# Altium PCB Eink1.1.PcbDoc
Units mil, origin at the board's own origin, x right, y up, seen from the top; angles counter-clockwise.
Board outline 1259.84 x 1360 mil, 2 copper layers (Top Layer, Bottom Layer); 75 components, 47 nets, 231 pads, 73 vias.
Unrouted connection lines stored in the file: 52.
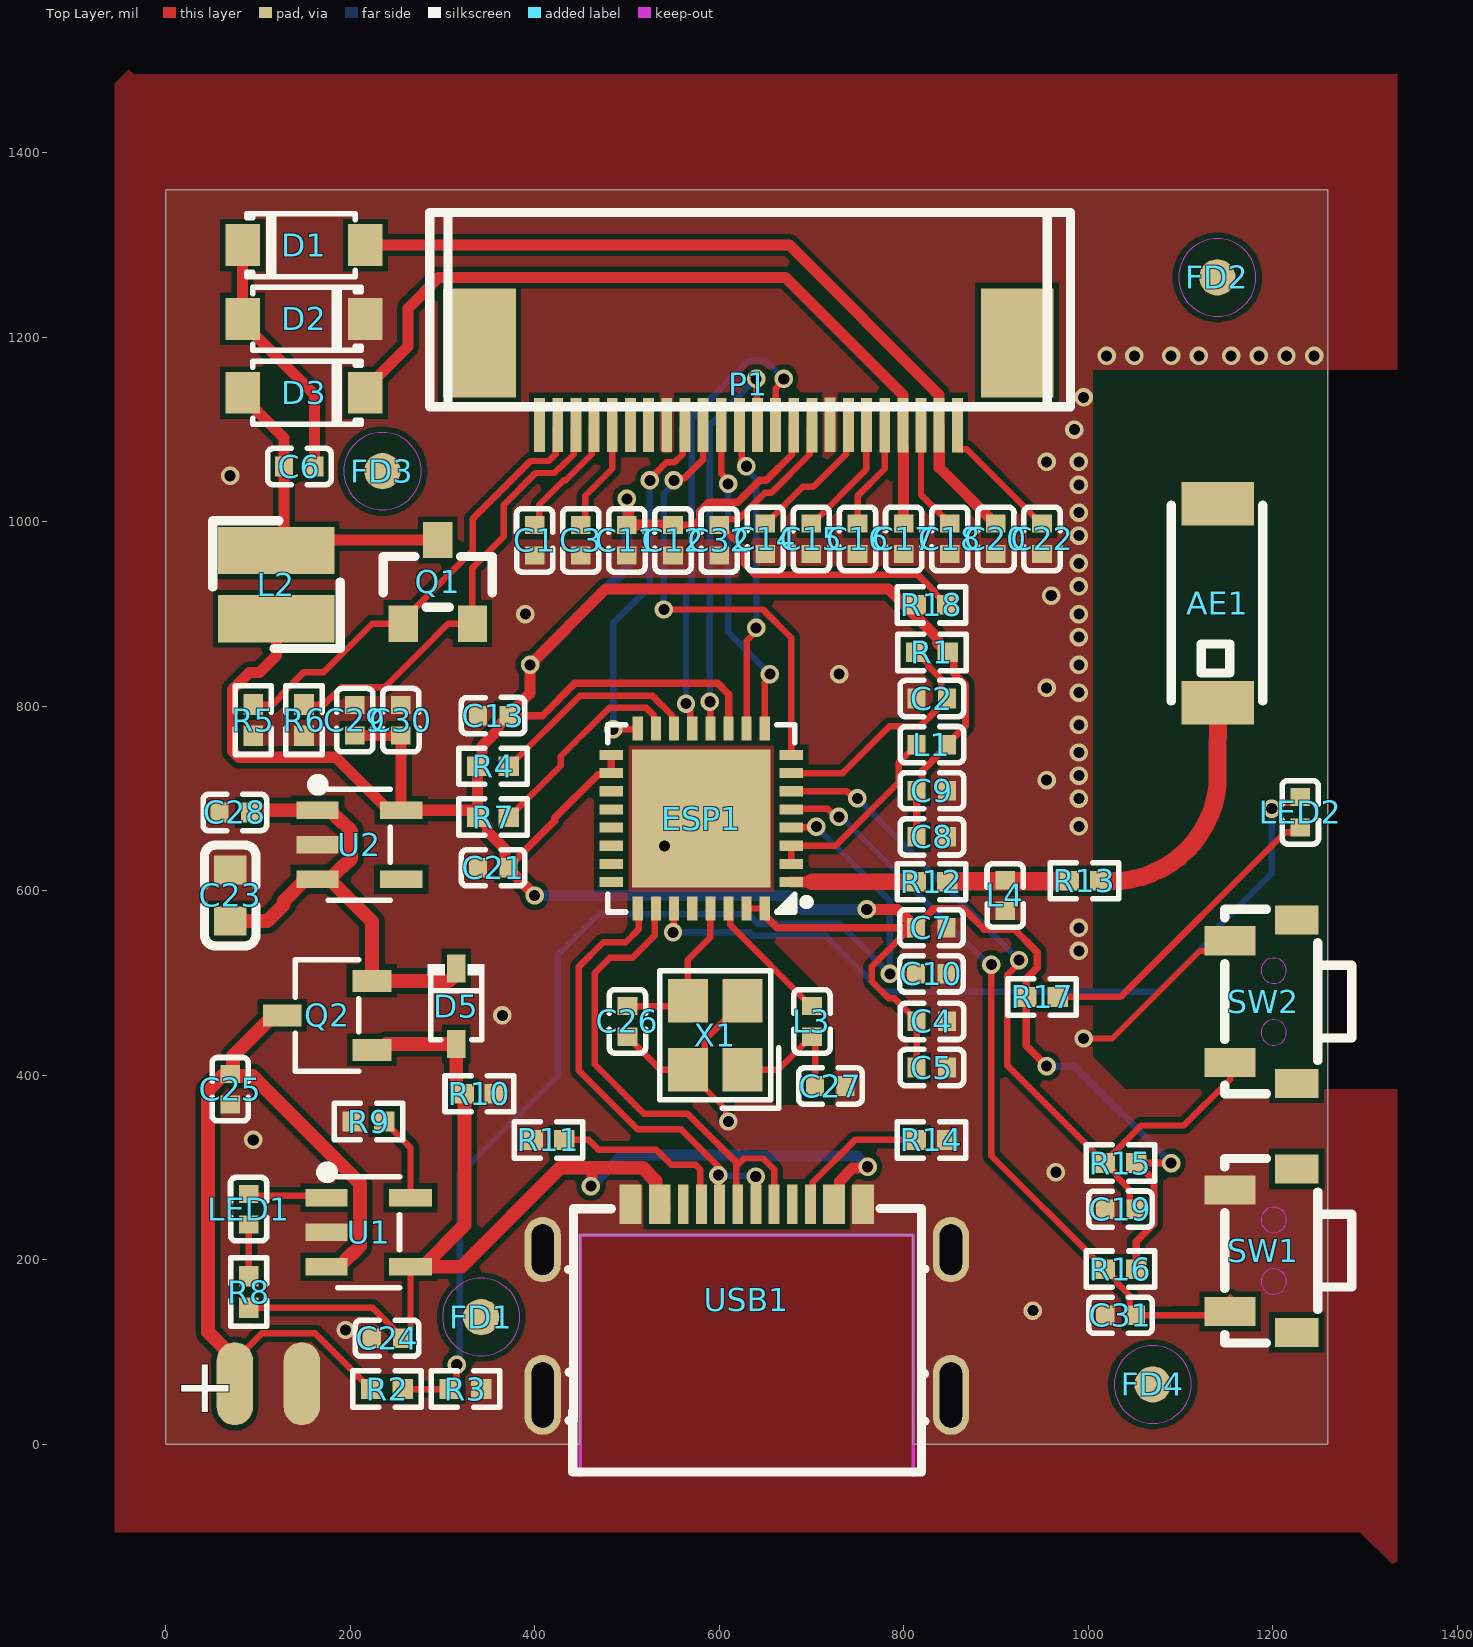
[diagram p0: Top Layer view]
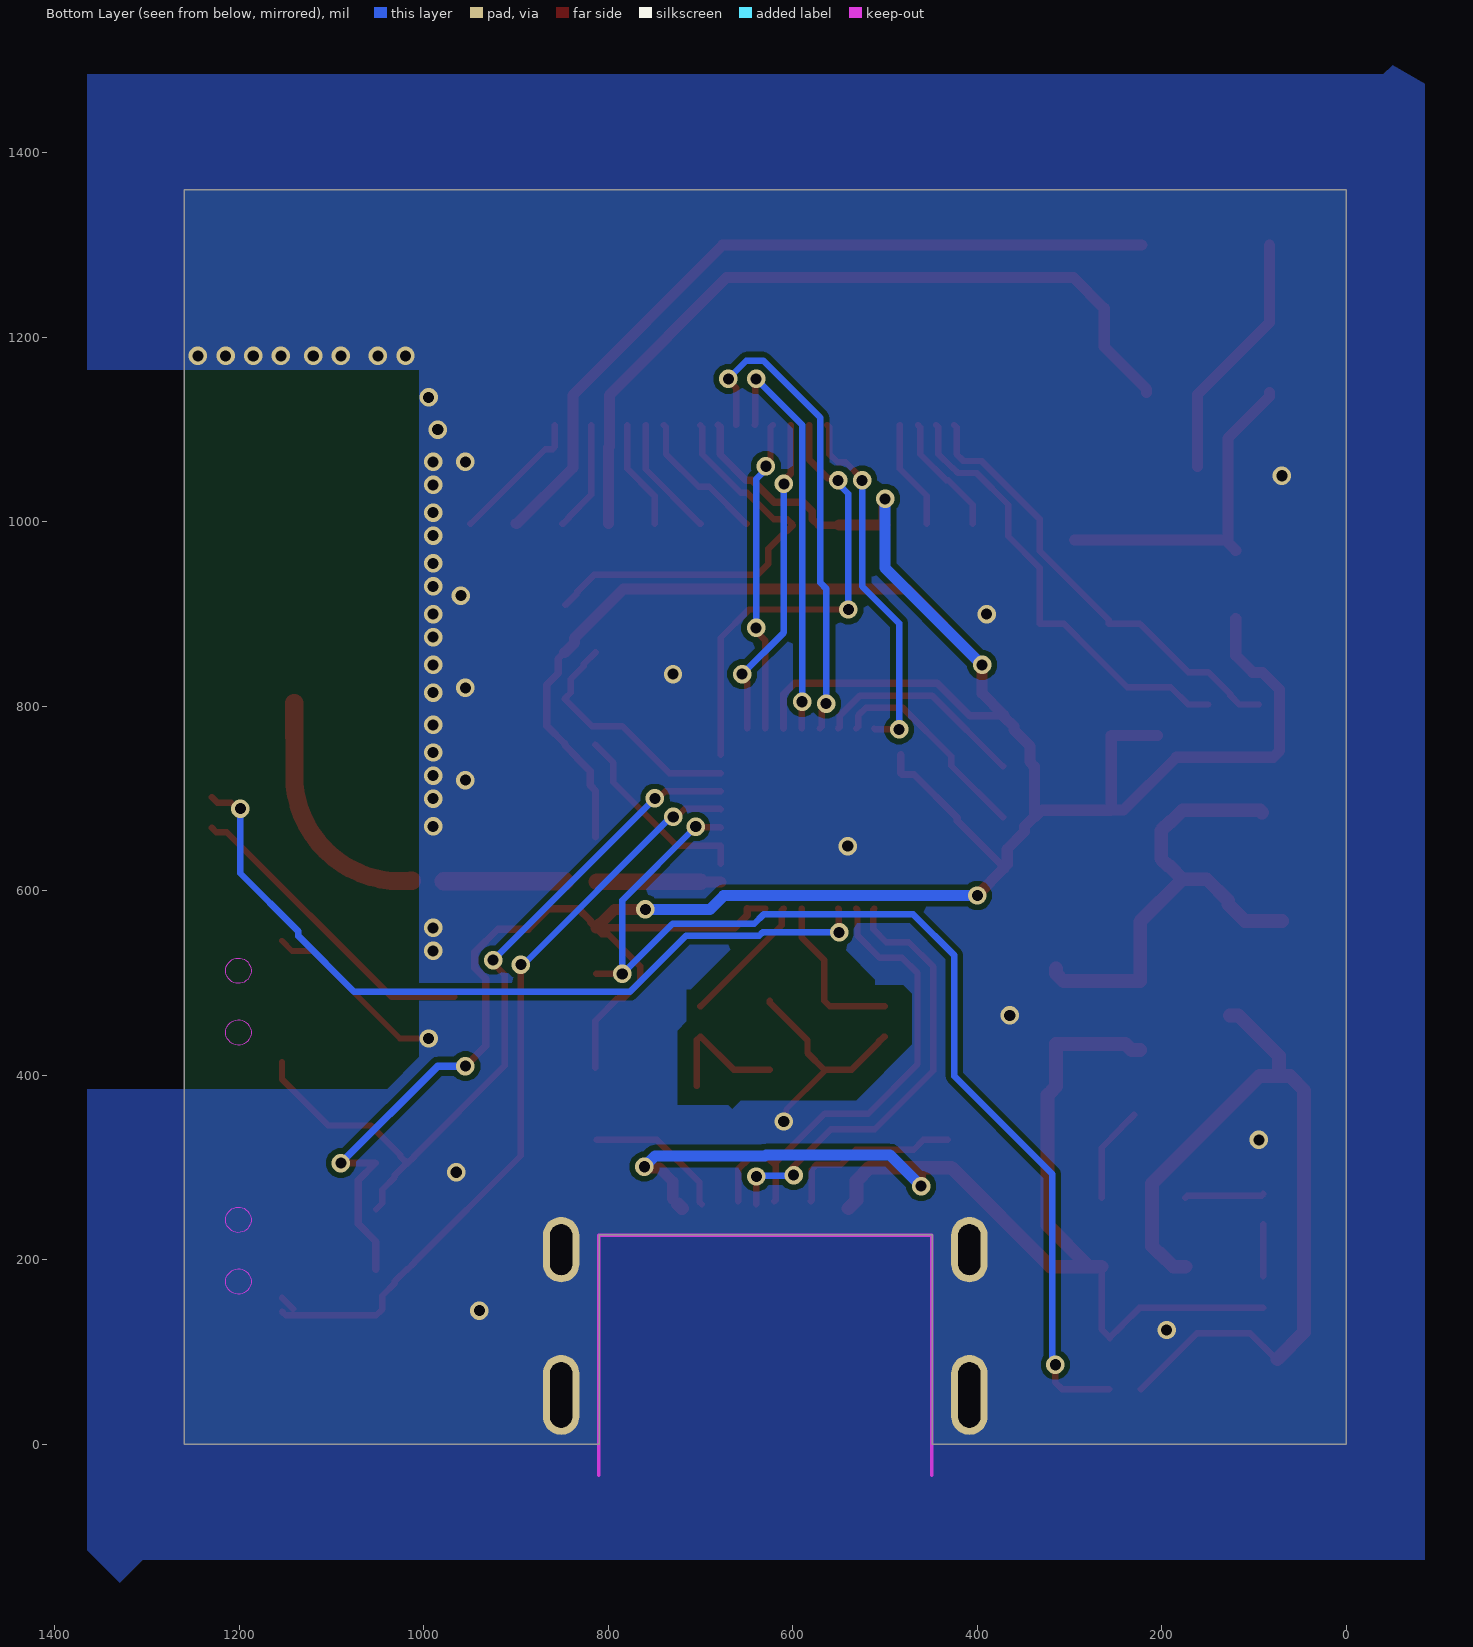
[diagram p1: Bottom Layer view, seen from below]

## Layer stack, top to bottom
Top Solder: solder mask 0.4, Solder Resist, Dk 3.5
Top Layer: signal copper 1.4
Dielectric 1: dielectric 12.6, FR-4, Dk 4.8
Bottom Layer: signal copper 1.4
Bottom Solder: solder mask 0.4, Solder Resist, Dk 3.5

## Board outline
0,0 0,1360 1259.84,1360 1259.84,0 810,0 810,227 449,227 449,0

## Design rules (kind name [scope] priority, off if disabled: settings)
Clearance [All] p1: gap=6 ignorepadtopadclearanceinfootprint=FALSE
ComponentClearance [All] p1: gap=2 collisioncheckmode=3 verticalgap=10 showdistances=FALSE
DiffPairsRouting [All] p1: maxlimit=10 minlimit=10 mostfreqgap=10 toplayer_minwidth=6 toplayer_maxwidth=15 toplayer_prefwidth=15 bottomlayer_minwidth=6 bottomlayer_maxwidth=15 bottomlayer_prefwidth=15 maxuncoupledlength=500
MatchedLengths [InDifferentialPairClass('All Differential Pairs')] p1: tolerance=39.37 checknetsindiffpair=FALSE checkdiffpairvsdiffpair=TRUE checkxsignals=TRUE checkothers=TRUE
MinimumSolderMaskSliver [All] p1: minsoldermaskwidth=2
PolygonConnect [All] p1: connectstyle=Direct reliefconductorwidth=10 reliefentries=4 polygonreliefangle="90 Angle" airgapwidth=10
RoutingVias [All] p1: holewidth=12 width=20 viastyle="Through Hole" minholewidth=12 minwidth=18 maxholewidth=30 maxwidth=50
SilkToSolderMaskClearance [IsPad] p1 off: minsilkscreentomaskgap=2 clearancetoexposedcopper=TRUE
SolderMaskExpansion [isvia] p1: expansion=4 istentingtop=TRUE
SupplyNets "Schematic Supply Nets_3" [InNet('GND')] p1: voltage=0.000
SupplyNets "Schematic Supply Nets" [InNet('VSYS')] p2: voltage=0.000
SupplyNets "Schematic Supply Nets_1" [InNet('VBAT')] p3: voltage=0.000
SupplyNets "Schematic Supply Nets_4" [InNet('3.3V')] p4: voltage=0.000
Width [All] p1: maxlimit=50 minlimit=6 preferedwidth=10
26 further rules are at their usual default settings.

## Classes and differential pairs
differential pair UD: +UD_P -UD_N

## Components (designator, comment, footprint, x,y, rotation, side; value= is the part's Value field where it differs from the comment)
AE1 "ANT5520" ANT_5520 1140,840 r90 top
C1 "1uF" C0402 400,980 r90 top
C2 "1uF" C0402 830.6,808.5 r0 top
C3 "1uF" C0402 450,980 r90 top
C4 "10nF" C0402 830.6,458.5 r0 top
C5 "1uF" C0402 830.6,408.5 r0 top
C6 "4.7uF" C0402 145,1060 r180 top
C7 "1uF" C0402 830,560 r180 top
C8 "10uF" C0402 830.6,658.5 r180 top
C9 "100nF" C0402 830.6,708.5 r180 top
C10 "100nF" C0402 830,510 r180 top
C11 "4.7uF" C0402 500,980 r90 top
C12 "1uF" C0402 550,980 r90 top
C13 "100nF" C0402 355,790 r180 top
C14 "1uF" C0402 650,981.54 r90 top
C15 "1uF" C0402 700,981.54 r90 top
C16 "1uF" C0402 750,981.54 r90 top
C17 "1uF" C0402 800,981.54 r90 top
C18 "1uF" C0402 850,981.54 r90 top
C19 "100nF" C0402 1035,255 r0 top
C20 "1uF" C0402 900,981.54 r90 top
C21 "100nF" C0402 355,625 r0 top
C22 "1uF" C0402 950,981.54 r90 top
C23 "47uF" C0603 70,595 r90 top
C24 "1uF" C0402 240,115 r0 top
C25 "10uF" C0402 70,385 r90 top
C26 "15pF" C0402 500.6,458.5 r90 top
C27 "15pF" C0402 720.6,388.5 r0 top
C28 "10uF" C0402 75,685 r0 top value=10UF
C29 "10uF" C0402 205,785 r270 top value=10UF
C30 "100nF" C0402 255,785 r270 top value=100NF
C31 "100nF" C0402 1035,140 r0 top
C32 "1uF" C0402 600,980 r90 top
D1 "MBR0530" SOD-123_L2.8-W1.8-LS3.7-RD 150,1300 r0 top
D2 "MBR0530" SOD-123_L2.8-W1.8-LS3.7-RD 150,1220 r180 top
D3 "MBR0530" SOD-123_L2.8-W1.8-LS3.7-RD 150,1140 r180 top
D5 "B5819WS" SOD-323_L1.7-W1.3-LS2.5-FD 315,475 r90 top
ESP1 "ESP32-C3FH4" QFN-32_L5.0-W5.0-P0.50-TL-EP3.7 580.6,678.5 r180 top
FD1 "Fiducial" FIDUCIAL_1MM 342,138 r0 top
FD2 "Fiducial" FIDUCIAL_1MM 1140,1265 r0 top
FD3 "Fiducial" FIDUCIAL_1MM 235,1055 r0 top
FD4 "Fiducial" FIDUCIAL_1MM 1070,65 r0 top
L1 "2nH" C0402 830.6,758.5 r180 top
L2 "47uH" L_L3_W3 120.39,932.01 r90 top
L3 "24nH" C0402 700.6,458.5 r270 top
L4 "3nH" C0402 910,595 r90 top value=4.7nH
LED1 "LED-0402-R" C0402 90,255 r90 top
LED2 "LED-0402-B" C0402 1230,685.14 r90 top
P1 "FPC 0.5MM 24P Pull type H2.0mm Pick up" FPC-SMD_24P-L17.5-W5.4-P0.50 631.59,1149.44 r180 top
Q1 "CJ3400" SOT-23_L2.9-W1.3-P1.90-LS2.4-BR 295,935 r270 top
Q2 "AO3401A" SOT-23-3_L2.9-W1.6-P1.90-LS2.8-BR_1 175,465 r0 top
R1 "10K" R0402 830.6,858.5 r0 top
R2 "3M" R0402 240,60 r180 top value=100kΩ
R3 "3M" R0402 325,60 r180 top value=100kΩ
R4 "10K" R0402 355,735 r0 top
R5 "10K" R0402 95,785 r270 top
R6 "2.2R" R0402 150,785 r270 top
R7 "10K" R0402 355,680 r0 top
R8 "1kΩ" R0402 90,165 r270 top
R9 "5.1k" R0402 220,350 r0 top
R10 "10K" R0402 340,380 r180 top value=10kΩ
R11 "5.1k" R0402 415,330 r0 top
R12 "0r" R0402 830,610 r0 top value=0Ω
R13 "0r" R0402 995.92,610.94 r0 top value=0Ω
R14 "5.1k" R0402 830,330 r180 top
R15 "10K" R0402 1035,305 r0 top
R16 "10K" R0402 1035,190 r0 top
R17 "1kΩ" R0402 950,485 r180 top
R18 "0r" R0402 830,910 r180 top value=0Ω
SW1 "TS24CA 250gf 013" SW-SMD_L4.7-W3.5-P3.35-EH 1190,210 r270 top
SW2 "TS24CA 250gf 013" SW-SMD_L4.7-W3.5-P3.35-EH 1190,480 r270 top
U1 "TP4067-4.35V" SOT-23-5_L3.0-W1.7-P0.95-LS2.8-BL 220,230 r270 top
U2 "RT9080-33GJ5" SOT-23-5_L3.0-W1.7-P0.95-LS2.8-BL 210,650 r270 top
USB1 "TYPEC" USB-C-SMD_TYPEC-302-BRP16SC16 630,155 r0 top
X1 "40MHz" CRYSTAL-SMD_4P-L2.5-W2.0-BL 595.6,443.5 r90 top

## Footprints (in the part's own frame and the unit in brackets; to place one, negate y for a bottom-side part, rotate by r counter-clockwise, add the part's x,y. Pads: shape width x height; smd on the part's side, far side on the other; paste and mask are expansions set on the pad)
ANT_5520 [mm]
  rect 1.2x2 smd: 1(-0.92,-0.01) 2(4.56,-0.01)
  silkscreen extent -0.87,-1.25 4.52,1.27
C0402 [mm]
  rect 0.5x0.54 smd paste+0.051: 1(-0.42,0) 2(0.42,0)
  silkscreen extent -0.87,-0.5 0.87,0.5
C0603 [mm]
  rect 0.8x0.9 smd paste+0.051: 1(-0.7,0) 2(0.7,0)
  silkscreen extent -1.39,-0.71 1.39,0.71
CRYSTAL-SMD_4P-L2.5-W2.0-BL [mm]
  rect 1.2x1.1 smd paste+0.051: 1(-0.95,-0.75) 2(0.95,-0.75) 3(0.95,0.75) 4(-0.95,0.75)
  silkscreen extent -2.01,-1.76 1.78,1.53
FIDUCIAL_1MM [mm] "FIDUCIAL_1MM"
  rrect100% 1x1 smd paste-1 mask+0: 1(0,0)
  Top Layer keep-out region: -1.063,0 -1.063,-0.105 -1.023,-0.31 -0.942,-0.504 -0.826,-0.678 -0.678,-0.826 -0.504,-0.942 -0.31,-1.023 -0.105,-1.063 0,-1.063 0.105,-1.063 0.31,-1.023 0.504,-0.942 0.678,-0.826 0.826,-0.678 0.942,-0.504 1.023,-0.31 1.063,-0.105 1.063,0 1.063,0.105 1.023,0.31 0.942,0.504 0.826,0.678 0.678,0.826 0.504,0.942 0.31,1.023 0.105,1.063 0,1.063 -0.105,1.063 -0.31,1.023 -0.504,0.942 -0.678,0.826 -0.826,0.678 -0.942,0.504 -1.023,0.31 -1.063,0.105 -1.063,0
FPC-SMD_24P-L17.5-W5.4-P0.50 [mm]
  rect 0.3x1.5 smd paste+0 mask+0.102: 1(5.745,1.129) 2(5.245,1.129) 3(4.746,1.129) 4(4.245,1.129) 5(3.746,1.129) 6(3.245,1.129) 7(2.746,1.129) 8(2.245,1.129) 9(1.746,1.129) 10(1.245,1.129) 11(0.746,1.129) 12(0.245,1.129) 13(-0.254,1.129) 14(-0.755,1.129) 15(-1.251,1.13) 16(-1.754,1.13) 17(-2.254,1.128) 18(-2.754,1.129) 19(-3.254,1.129) 20(-3.756,1.132) 21(-4.256,1.132) 22(-4.756,1.132) 23(-5.256,1.132) 24(-5.756,1.132)
  rect 2x3 smd paste+0 mask+0.102: 25(-7.401,-1.132) 26(7.401,-1.125)
  silkscreen extent -8.87,-4.72 8.77,0.63
L_L3_W3 [mm]
  rect 1.3x3.2 smd: 1(-0.94,0.01) 2(0.94,0.01)
  silkscreen extent -1.76,-1.75 1.76,1.76
QFN-32_L5.0-W5.0-P0.50-TL-EP3.7 [mil]
  rect 25.6x11 smd paste-3937 mask+2: 1(-97.6,68.9) 2(-97.6,49.2) 3(-97.6,29.5) 4(-97.6,9.9) 5(-97.6,-9.8) 6(-97.6,-29.5) 7(-97.6,-49.2) 8(-97.6,-68.9) 17(97.5,-68.9) 18(97.5,-49.2) 19(97.5,-29.5) 20(97.5,-9.8) 21(97.5,9.9) 22(97.5,29.5) 23(97.5,49.2) 24(97.5,68.9)
  rect 11x25.6 smd paste-3937 mask+2: 9(-68.9,-97.5) 10(-49.2,-97.5) 11(-29.6,-97.5) 12(-9.9,-97.5) 13(9.8,-97.5) 14(29.5,-97.5) 15(49.2,-97.5) 16(68.9,-97.5) 25(68.9,97.6) 26(49.2,97.6) 27(29.5,97.6) 28(9.8,97.6) 29(-9.9,97.6) 30(-29.6,97.6) 31(-49.2,97.6) 32(-68.9,97.6)
  rect 149.6x149.6 smd paste-3937 mask+2: 33(0,0)
  silkscreen extent -118,-101 101,101
R0402 [mm]
  rect 0.566x0.54 smd paste-100 mask+0.051: 1(-0.433,0) 2(0.433,0)
  silkscreen extent -0.94,-0.5 0.94,0.5
SOD-123_L2.8-W1.8-LS3.7-RD [mil]
  rect 37.4x45.3 smd: 1(-66.6,0) 2(66.6,0)
  silkscreen extent -62,-34 55,34
SOD-323_L1.7-W1.3-LS2.5-FD [mm]
  rect 0.78x0.5 smd paste+0.051: 1(-1.04,0) 2(1.04,0)
  silkscreen extent -0.93,-0.78 1.15,0.78
SOT-23-3_L2.9-W1.6-P1.90-LS2.8-BR_1 [mm]
  rect 1.07x0.6 smd paste+0.051: 1(1.235,-0.95) 2(1.235,0.95) 3(-1.235,0)
  silkscreen extent -0.88,-1.54 0.88,1.54
SOT-23-5_L3.0-W1.7-P0.95-LS2.8-BL [mm]
  rect 0.49x1.157 smd paste+0.051: 1(-0.95,-1.154) 2(0,-1.154) 3(0.95,-1.154)
  rect 0.49x1.175 smd paste+0.051: 4(0.95,1.154) 5(-0.95,1.154)
  silkscreen extent -1.8,-1.29 1.53,0.85
SOT-23_L2.9-W1.3-P1.90-LS2.4-BR [mil]
  rect 39.4x31.5 smd paste+0 mask+2: 1(45.3,-37.4) 2(45.3,37.4) 3(-45.3,0)
  silkscreen extent -28,-59 28,59
SW-SMD_L4.7-W3.5-P3.35-EH [mm]
  rect 0.8x1.4 smd paste+0.051: 1(-1.675,-0.917) 2(1.675,-0.917)
  rect 0.8x1.2 smd paste+0.051: 3(-2.25,0.917) 4(2.25,0.917)
  Keep-Out Layer circle w0.003: c0.85,0.282 r0.35
  Keep-Out Layer circle w0.003: c-0.85,0.282 r0.35
  silkscreen extent -2.54,-1.07 2.54,2.43
USB-C-SMD_TYPEC-302-BRP16SC16 [mm]
  rect 0.6x1.1 smd paste-100 mask+0.05: 1(-3.2,2.675) 2(-2.4,2.675) 11(2.4,2.675) 12(3.2,2.675)
  rect 0.3x1.1 smd paste-100 mask+0.05: 3(-1.75,2.675) 4(-1.25,2.675) 5(-0.75,2.675) 6(-0.25,2.675) 7(0.25,2.675) 8(0.75,2.675) 9(1.25,2.675) 10(1.75,2.675)
  oval 1x1.8 hole 0.61 slot 1.4 at 90 deg paste-2539.97 mask+0.05: 13(-5.62,1.425) 14(5.62,1.425)
  oval 1x2.2 hole 0.61 slot 1.8 at 90 deg paste-2539.97 mask+0.05: 15(-5.62,-2.575) 16(5.62,-2.575)
  Keep-Out Layer lines w0.099: -4.582,-4.782 -4.582,1.818 4.582,1.818 4.582,-4.782
  silkscreen extent -4.9,-4.7 4.9,2.56

## Part data
AE1: library part ANT_5520
C1 C3 C12 C14 C15 C16 C17 C18 C20 C22 C32: library part 105, Contributor=LCEDA_Lib, nameAlias=Value(F), spicePre=C, spiceSymbolName=C_0603_US
C2 C4 C5 C13 C19 C21 C31: library part CAP_0603, AddInBom=yes, ConvertToPcb=yes, Device=CAP_0603, FootprintName=C0402, ModelId=ac125912035d415993ca9572d50418b1, ModelName=C0603_L1.6-W0.8-H0.8, ModelTransform=62.992,31.496,0,0,0,0,0,0,0, Supplier Footprint=0603, SymbolName=CapAcitance
C6: library part 4.7uf, Contributor=LCEDA_Lib, nameAlias=Value(F), spicePre=C, spiceSymbolName=C_0603_US
C7: library part 1UF, Add into BOM=yes, Convert to PCB=yes, Device=1UF, FootprintName=C0603, ModelId=fca5be93b99f4b5a9a2fd372d58c31d9, ModelName=C0603, Origin Footprint=C0603, Symbol=1UF
C8 C25: library part 10UF, Add into BOM=yes, Convert to PCB=yes, Device=10UF, FootprintName=C0603, ModelId=fca5be93b99f4b5a9a2fd372d58c31d9, ModelName=C0603, Origin Footprint=C0603, Symbol=10UF
C9: library part 100NF, Add into BOM=yes, Convert to PCB=yes, Device=100NF, FootprintName=C0603, ModelId=fca5be93b99f4b5a9a2fd372d58c31d9, ModelName=C0603, Origin Footprint=C0603, Symbol=100NF
C10: library part CL21B104KBCNNNC, "容值:100nF;精度:±10%;额定电压:50V;材质(温度系数):X7R;", JLCPCB Part Class="Extended Part", LCSC Part Name="100nF ±10% 50V", Manufacturer=SAMSUNG(三星), Temperature Coefficient=X7R, Tolerance=±10%, Voltage Rated=50V, 3D Model=1ba041120af144c991958decab20d241, 3D Model Transform=78.74,51.181,0,0,0,0,0,0.0005,0, Add into BOM=yes, Convert to PCB=yes, Datasheet=https://atta.szlcsc.com/upload/public/pdf/source/20160103/1457707693305.pdf, Device=CL21B104KBCNNNC, FootprintName=C0603, Manufacturer Part=CL21B104KBCNNNC, ModelName=C0805_L2.0-W1.3-H1.3, Origin Footprint=C0805, Supplier=LCSC, Supplier Footprint=0805, Supplier Part=C1711, Symbol=100nF_1
C11: JLCPCB SMD=Yes, Manufacturer=MuRata, Manufacturer Part=GRM31CR71H475KA12L, nameAlias=Capacitance, SMT Type=Extend, spicePre=C, spiceSymbolName=GRM31CR71H475KA12L, Supplier=LCSC, Supplier Part=C77096
C23: library part CA45-B-10V-47uF-K, "容值:47uF;精度:±10%;额定电压:10V;等效串联电阻:2.4Ω@100kHz;", Equivalent Series Resistance(ESR)=2.4Ω@100kHz, JLCPCB Part Class="Extended Part", LCSC Part Name="47uF ±10% 10V", Manufacturer=CEC(振华新云), Operating Temperature=-55℃~+125℃, Rated Voltage=10V, Tolerance=±10%, 3D Model=b77bd53aeda446d2bdd09b0fdaf9418a, 3D Model Transform=145.669,110.236,0,0,0,0,0,0,0, Add into BOM=yes, Convert to PCB=yes, Datasheet=https://atta.szlcsc.com/upload/public/pdf/source/20171123/C136658_15114108124621137439.pdf, Device=CA45-B-10V-47uF-K, FootprintName=CASE-B_3528, Manufacturer Part=CA45-B-10V-47uF-K, ModelName=CASE-B_L3.5-W2.8-H1.9, Origin Footprint=CAP-SMD_L3.5-W2.8-R-RD, Supplier=LCSC, Supplier Footprint=CASE-B-3528, Supplier Part=C136658, Symbol=47uF
C26 C27: library part 10PF, Add into BOM=yes, Convert to PCB=yes, Device=10PF, FootprintName=C0603, ModelId=fca5be93b99f4b5a9a2fd372d58c31d9, ModelName=C0603, Symbol=10PF
  C26: Origin Footprint=C0603
C28 C29: library part CL21A106KAYNNNE_C15850, "容值:10uF;精度:±10%;额定电压:25V;材质(温度系数):X5R;", JLCPCB Part Class=基础库, LCSC Part Name="10uF ±10% 25V", Manufacturer=SAMSUNG(三星), Manufacturer Part=CL21A106KAYNNNE, Temperature Coefficient=X5R, Tolerance=±10%, Voltage Rated=25V, 3D Model=1ba041120af144c991958decab20d241, 3D Model Transform=78.74,51.181,0,0,0,0,0,0.0005,0, AddInBom=yes, ConvertToPcb=yes, Datasheet=https://atta.szlcsc.com/upload/public/pdf/source/20160103/1457707679302.pdf, Device=CL21A106KAYNNNE_C15850, FootprintName=C0805, ModelName=C0805_L2.0-W1.3-H1.3, Supplier=LCSC, Supplier Footprint=0805, Symbol=CL21A106KAYNNNE
C30: library part CC0603KRX7R9BB104, "容值:100nF;精度:±10%;额定电压:50V;材质(温度系数):X7R;", JLCPCB Part Class=基础库, LCSC Part Name="100nF ±10% 50V", Manufacturer=YAGEO(国巨), Temperature Coefficient=X7R, Tolerance=±10%, Voltage Rated=50V, 3D Model=ac125912035d415993ca9572d50418b1, 3D Model Transform=62.992,31.496,0,0,0,0,0,0,0, AddInBom=yes, ConvertToPcb=yes, Datasheet=https://atta.szlcsc.com/upload/public/pdf/source/20180910/C282072_33301C7F631E79921B82A8DAC6BCC5B3.pdf, Device=CC0603KRX7R9BB104, FootprintName=C0603, Manufacturer Part=CC0603KRX7R9BB104, ModelName=C0603_L1.6-W0.8-H0.8, Supplier=LCSC, Supplier Footprint=0603, Symbol=CC0603KRX7R9BB104
D1 D2 D3: LCSC Assembly=Yes, Manufacturer=CJ, image=//image.lceda.cn/szlcsc/C77336.jpg, Manufacturer Part=MBR0530, SMT Type=Extend, spicePre=D, spiceSymbolName=MBR0530, Supplier=LCSC, Supplier Part=C77336
D5: library part B5819WS_C7420331, "二极管配置:独立式;正向压降(Vf):600mV@1.0A;直流反向耐压(Vr):40V;整流电流:1A;", Current - Rectified=1A, Forward Voltage (Vf@If)=600mV@1.0A, JLCPCB Part Class="Extended Part", LCSC Part Name="电压:40V 电流:1A", Manufacturer=R+O(宏嘉诚), Non-Repetitive Peak Forward Surge Current=10A, Operating Junction Temperature Range=-55℃~+150℃, Reverse Leakage Current (Ir)=1mA@40V, Reverse Voltage (Vr)=40V, 3D Model=0f2f330c645944df9245ac3c3fec3456聨0819f05c4eef4c71ace90d822a990e87, 3D Model Transform=98.425,49.2125,0,180,0,0,0,0,0, AddInBom=yes, ConvertToPcb=yes, Datasheet=https://item.szlcsc.com/datasheet/B5819WS/8397153.html, Device=B5819WS_C7420331, Diode Configuration=独立式, FootprintName=SOD-323_L1.7-W1.3-LS2.5-FD, Manufacturer Part=B5819WS, ModelName=SOD-323_L1.7-W1.3-LS2.5-FD, Rectified Current=1A, Supplier=LCSC, Supplier Footprint=SOD-323, Supplier Part=C7420331, Symbol=B5819WS_C7420331_1, Voltage - DC Reverse(Vr)=40V, Voltage - Forward(Vf@If)=600mV@1.0A
ESP1: JLCPCB Part Class=扩展库, Manufacturer=ESPRESSIF(乐鑫), AddInBom=yes, ConvertToPcb=yes, Datasheet=https://atta.szlcsc.com/upload/public/pdf/source/20231220/86199E4714F7A99F6AA9401EA48CDBDA.pdf, Device=ESP32-C3FH4, FootprintName=QFN-32_L5.0-W5.0-P0.50-TL-EP3.7, LCSC Part Name=ESP32-C3FH4, Manufacturer Part=ESP32-C3FH4, ModelId=1b373353bf024628a0546c2e0a05c449, ModelName=QFN-32_L5.0-W5.0-H0.9-P0.50-TL-EP3.7, ModelTransform=196.85,196.85,0,0,0,0,0,0,0, Supplier=LCSC, Supplier Footprint=QFN-32-EP(5x5), Supplier Part=C2858491, Symbol=ESP32-C3FH4
L2: library part 68uH, Manufacturer=Sunlord, Manufacturer Part=SWPA6045S680MT, nameAlias=Inductance, spicePre=L, spiceSymbolName=SWPA6045S680MT, Supplier=LCSC, Supplier Part=C53663
L4: library part Device_L, "Inductor", LCSC=C13595, AddInBom=yes, Attribute1=L6, Device=Device_L, FootprintName=Inductor_SMD:L_0402_1005Metric, ki_fp_filters="Choke_* *Coil* Inductor_* L_*", ki_keywords="inductor choke coil reactor magnetic", MNF PART NUMBER=C13595, Symbol=Device_L, UniqueId=01f5988480b85854, UserDocLink=~
LED1 LED2: library part LED-0603_G, Manufacturer=EVERLIGHT(台湾亿光), Manufacturer Part=19-217/GHC-YR1S2/3T, Add into BOM=yes, Convert to PCB=yes, Device=LED-0603_G, FootprintName=LED0603_GREEN, ModelId=8b5fcaf0229049f8a37a9c352bb0ca0a, ModelName=LED-0603_G, Origin Footprint=LED0603_GREEN, Supplier=LCSC, Supplier Part=C72043, Symbol=LED-0603_G
P1: Manufacturer=ReliaPro, image=//image.lceda.cn/szlcsc/C11092.jpg, Manufacturer Part="FPC 0.5MM 24P Pull type H2.0mm Pick up", spicePre=X, spiceSymbolName="FPC 0.5MM 24P Pull type H2.0mm Pick up", Supplier=LCSC, Supplier Part=C11092
Q1: "类型:N沟道;漏源电压(Vdss):30V;连续漏极电流(Id):5.8A;功率(Pd):350mW;导通电阻(RDS(on)@Vgs,Id):35mΩ@10V,5.8A;阈值电压(Vgs(th)@Id):1.4V@250uA;", Continuous Drain Current (Id)=5.8A, Drain Source On Resistance (RDS(on)@Vgs,Id)=35mΩ@10V,5.8A, Drain Source Voltage (Vdss)=30V, Gate Threshold Voltage (Vgs(th)@Id)=1.4V@250uA, JLCPCB Part Class="Extended Part", LCSC Part Name="N沟道 30V 5.8A", Manufacturer=CJ(江苏长电/长晶), Power Dissipation (Pd)=350mW, AddInBom=yes, ConvertToPcb=yes, Datasheet=https://atta.szlcsc.com/upload/public/pdf/source/20140809/1457707205786.pdf, Device=CJ3400, FootprintName=SOT-23_L2.9-W1.3-P1.90-LS2.4-BR, ManufacturerPart=CJ3400, ModelId=c62791f0466c4ae2a892c056b845b0ca, ModelName=SOT-23-3P_L2.9-W1.3-H1.0-LS2.4-P0.95, ModelTransform=98.64468,114.173,0,180,0,0,0,0,0, Supplier=LCSC, Supplier Footprint=SOT-23, SupplierPart=C19019, Symbol=CJ3400, Type=N沟道
Q2: library part CJ3401_1, "类型:P沟道;漏源电压(Vdss):30V;连续漏极电流(Id):4.2A;功率(Pd):350mW;导通电阻(RDS(on)@Vgs,Id):65mΩ@10V,4.2A;", Continuous Drain Current (Id)=4.2A, Drain Source On Resistance (RDS(on)@Vgs,Id)=65mΩ@10V,4.2A, Drain Source Voltage (Vdss)=30V, Gate Threshold Voltage (Vgs(th)@Id)=1.3V@250uA, JLCPCB Part Class="Extended Part", LCSC Part Name="P沟道 30V 4.2A", Manufacturer=CJ(江苏长电/长晶), Manufacturer Part=CJ3401, Power Dissipation (Pd)=350mW, 3D Model=89cb27a44ab2466697082bb9fd73a7d0, 3D Model Transform=110.236,114.173,0,180,0,0,-0.005,0.0005,0, Add into BOM=yes, Convert to PCB=yes, Datasheet=https://atta.szlcsc.com/upload/public/pdf/source/20140815/1457707217656.pdf, Device=CJ3401_1, FootprintName=SOT-23-3_L2.9-W1.6-P1.90-LS2.8-BR_1, ModelName=SOT-23-3L_L2.9-W1.6-H1.1-LS2.8-P0.95, Origin Footprint=SOT-23-3_L2.9-W1.6-P1.90-LS2.8-BR, Supplier=LCSC, Supplier Footprint=SOT-23, Supplier Part=C13799, Symbol=CJ3401, Type=P沟道
R1 R4 R7 R15 R16: library part Res_0603, AddInBom=yes, ConvertToPcb=yes, Device=Res_0603, FootprintName=R0402, ModelId=fc143cca1e79419f9cd78b61e9279f08, ModelName=R0603, ModelTransform=31.8897,63.7794,0,90,0,0,0,0,0, Supplier Footprint=0603, Symbol=电阻
R2 R3: library part AC0805FR-0710KL, "电阻类型:厚膜电阻;阻值:10kΩ;精度:±1%;功率:125mW;", JLCPCB Part Class="Extended Part", LCSC Part Name="10kΩ ±1% 125mW", Manufacturer=YAGEO(国巨), Operating Temperature Range=-55℃~+155℃, Overload Voltage (Max)=150V, Power(Watts)=125mW, Resistance=100kΩ, Temperature Coefficient=±100ppm/℃, Tolerance=±1%, 3D Model=37a81e68749a4138bd2dfa6897b24b85, 3D Model Transform=78.74,51.181,0,0,0,0,0,-0.0005,0, Add into BOM=yes, Convert to PCB=yes, Datasheet=https://atta.szlcsc.com/upload/public/pdf/source/20171113/C140868_15105613027091115785.pdf, Device=AC0805FR-0710KL, FootprintName=R0603, Manufacturer Part=AC0805FR-0710KL, ModelName=R0805_L2.0-W1.3-H0.6, Origin Footprint=R0805, Supplier=LCSC, Supplier Footprint=0805, Symbol=10K_1, Type=厚膜电阻
R5: library part 10k, Contributor=LCEDA_Lib, nameAlias=Value(Ω), spicePre=R, spiceSymbolName=R_0603_US
R8 R17: library part 0603WAF1001T5E, "电阻类型:厚膜电阻;阻值:1kΩ;精度:±1%;功率:100mW;工作电压:75V;温度系数:±100ppm/℃;", JLCPCB Part Class="Basic Part", LCSC Part Name="1kΩ ±1% 100mW 厚膜电阻", Manufacturer=UNI-ROYAL(厚声), Operating Temperature=-55℃~+155℃, Power(Watts)=100mW, Temperature Coefficient=±100ppm/℃, Tolerance=±1%, Voltage-Supply(Max)=75V, 3D Model=fc143cca1e79419f9cd78b61e9279f08, 3D Model Transform=31.8897,63.7794,0,90,0,0,0,0,0, Add into BOM=yes, Convert to PCB=yes, Datasheet=https://item.szlcsc.com/datasheet/0603WAF1001T5E/21904.html, Device=0603WAF1001T5E, FootprintName=R0603, Manufacturer Part=0603WAF1001T5E, ModelName=R0603, Supplier=LCSC, Supplier Footprint=0603, Supplier Part=C21190, Symbol=0603WAF1001T5E, Type=厚膜电阻
R9: library part 4.7K, 3D Model=6bd5cd867e9542ebae21caaf5d2d4c4d, 3D Model Transform=v2:[2.410722045565656e-15,39.37007874015748,0,-39.37007874015748,2.410722045565656e-15,0,0,0,39.37007874015748,0,0,0], Add into BOM=yes, Convert to PCB=yes, Device=4.7K, FootprintName=R0603, ModelName=R0603, Symbol=4.7K
R10: library part AC0805FR-0710KL, "电阻类型:厚膜电阻;阻值:10kΩ;精度:±1%;功率:125mW;", JLCPCB Part Class="Extended Part", LCSC Part Name="10kΩ ±1% 125mW", Manufacturer=YAGEO(国巨), Operating Temperature Range=-55℃~+155℃, Overload Voltage (Max)=150V, Power(Watts)=125mW, Resistance=10kΩ, Temperature Coefficient=±100ppm/℃, Tolerance=±1%, 3D Model=37a81e68749a4138bd2dfa6897b24b85, 3D Model Transform=78.74,51.181,0,0,0,0,0,-0.0005,0, Add into BOM=yes, Convert to PCB=yes, Datasheet=https://atta.szlcsc.com/upload/public/pdf/source/20171113/C140868_15105613027091115785.pdf, Device=AC0805FR-0710KL, FootprintName=R0603, Manufacturer Part=AC0805FR-0710KL, ModelName=R0805_L2.0-W1.3-H0.6, Origin Footprint=R0805, Supplier=LCSC, Supplier Footprint=0805, Supplier Part=C140868, Symbol=10K_1, Type=厚膜电阻
R12 R13 R18: library part 0402WGF0000TCE, "阻值:0Ω;精度:±1%;功率:62.5mW;温度系数:±800ppm/℃;电阻类型:厚膜电阻;", JLCPCB Part Class="Basic Part", LCSC Part Name="0Ω ±1% 62.5mW 厚膜电阻", Manufacturer=UNI-ROYAL(厚声), Operating Temperature Range=-55℃~+155℃, Overload Voltage (Max)=50V, Power(Watts)=62.5mW, Temperature Coefficient=±800ppm/℃, Tolerance=±1%, AddInBom=yes, ConvertToPcb=yes, Datasheet=https://atta.szlcsc.com/upload/public/pdf/source/20200306/C422600_1E6D84923E4A46A82E41ADD87F860B5C.pdf, Device=0402WGF0000TCE, FootprintName=R0402, Manufacturer Part=0402WGF0000TCE, ModelId=671aefced39d4c318694bba8bd8efd39, ModelName=R0402_L1.0-W0.5-H0.5, ModelTransform=39.37,19.685,0,0,0,0,0,0.0005,0, Supplier=LCSC, Supplier Footprint=0402, Supplier Part=C17168, Symbol=0402WGF0000TCE, Type=厚膜电阻
SW1 SW2: "电路结构:单刀单掷;按钮形状:矩形按钮;作用力:250gf;安装方式:卧贴;开关长度:4.55mm;开关宽度:1.8mm;开关高度:3.5mm;带支架:不带;触点电流:50mA;额定电压(AC):-;额定电压(DC):12V;额定功率:0.6W;绝缘电阻:100MΩ;带灯:无;机械寿命:3万次;", Actuator/Cap Color=黑色, Contact Current=50mA, Insulation Resistance=100MΩ, IP Rating=-, JLCPCB Part Class=扩展库, LCSC Part Name="2*4*3.5mm半包小贝贝TS-018小侧按键m165蓝牙耳机开关 250gf", Manufacturer="SHOU HAN(首韩)", Operating Force=250gf, Operating Temperature=-40℃~+85℃, Power Rating=0.6W, Voltage Rating (DC)=12V, Actuator Style=矩形按钮, AddInBom=yes, Circuit=单刀单掷, ConvertToPcb=yes, Datasheet=https://atta.szlcsc.com/upload/public/pdf/source/20230321/913029B0FB0CD391AF5EFD51697D8EC4.pdf, Device="TS24CA 250gf 013", FootprintName=SW-SMD_L4.7-W3.5-P3.35-EH, ManufacturerPart="TS24CA 250gf 013", Mechanical Life=3万次, ModelId=763936bace60400091d42d91968ac4d8, ModelName=SW-SMD_L4.7-W3.5-H1.9-P3.35-EH, ModelTransform=185.039,143.691,0,0,0,0,0,23.974,-15.748, Mounting Style=卧贴, Pin Style=-, Strike Gundam=不带, Supplier=LCSC, Supplier Footprint=SMD, SupplierPart=C5373430, Switch Height=3.5mm, Switch Length=4.55mm, Switch Width=1.8mm, Symbol="TS24CA 250GF 013", Voltage Rating (AC)=-, With Lamp=无
U1: library part LTC4054
U2: library part RT9013-33GB, "输出类型:固定;输出极性:正;最大输入电压:5.5V;输出电压:3.3V;输出电流:500mA;电源纹波抑制比(PSRR):50dB@(10kHz);", Dropout Voltage=400mV@(500mA), JLCPCB Part Class=扩展库, LCSC Part Name="输入5.5V 输出3.3V 500mA", Manufacturer=RICHTEK(立锜), Maximum Input Voltage=5.5V, Operating Temperature=-40℃~+85℃, Output Current=500mA, Output Voltage=3.3V, Power Supply Rejection Ratio (PSRR)=50dB@(10kHz), Quiescent Current (Ground Current)=50uA, 3D Model=0a2a1b8f50944f73965918ad6e5fe167, 3D Model Transform=118.60433,114.173,0,90,0,0,0.0005,0.0005,0, AddInBom=yes, ConvertToPcb=yes, Datasheet=https://atta.szlcsc.com/upload/public/pdf/source/20150504/1457707282459.pdf, Device=RT9013-33GB, Feature=-, FootprintName=SOT-23-5_L3.0-W1.7-P0.95-LS2.8-BL, Manufacturer Part=RT9013-33GB, ModelName=SOT-23-5_L2.9-W1.6-H1.1-LS2.8-P0.95, Noise=-, Number of Outputs=1, Output Polarity=正, Output Type=固定, Supplier=LCSC, Supplier Footprint=SOT-23-5, Supplier Part=C47773, Symbol=RT9013-33GB
USB1: library part TYPEC-沉板1.6mm, "连接器类型:Type-C;标准:USB 3.1;公母:母;端口数量:1;触点数量:16P;安装方式:沉板;额定电流 - 电源:5A;工作温度范围:-45℃~+85℃;焊接温度(最大值):260℃;", Current Rating - Power (Max)=5A, JLCPCB Part Class="Extended Part", LCSC Part Name="Type-C 母 沉板", Manufacturer=XUNPU(讯普), ManufacturerPart=TYPEC-302-BRP16SC16, Operating Temperature Range=-45℃~+85℃, Soldering Temperature(Max)=260℃, AddInBom=yes, Connector Type=Type-C, ConvertToPcb=yes, Datasheet=https://atta.szlcsc.com/upload/public/pdf/source/20210629/C2835313_96CAAD9C15DFF4F1D03DDC0B4E6AD92A.pdf, Device=TYPEC-沉板1.6mm, FootprintName=USB-C-SMD_TYPEC-302-BRP16SC16, Gender=母, ModelId=83e9ad9c543d46a9a9a2dd567b3f71cf, ModelName=USB-C-SMD_TYPEC-302-BRP16SC16, ModelTransform=454.33,283.464,0,0,0,0,0,-41.337,-62.992, Mounting Style=沉板, Number of Contacts=16P, Number of Ports=1, Standard="USB 3.1", Supplier=LCSC, Supplier Footprint=SMD, SupplierPart=C2835313, Symbol=TYPEC-沉板1.6mm
X1: JLCPCB Part Class="Extended Part", Manufacturer=JGHC(晶光华), Add into BOM=yes, Convert to PCB=yes, Device=40MHz, FootprintName=CRYSTAL-SMD_4P-L2.5-W2.0-BL, ModelId=d23e0abc26e54c15b6292fd5f43702fa, ModelName=CRYSTAL-SMD_4P-L2.5-W2.0-BL, Origin Footprint=CRYSTAL-SMD_4P-L2.5-W2.0-BL, Supplier=LCSC, Supplier Part=C555614, Symbol=40MHz
C24: Add into BOM=yes, Convert to PCB=yes, Device=1UF, FootprintName=C0603, ModelId=fca5be93b99f4b5a9a2fd372d58c31d9, ModelName=C0603, Origin Footprint=C0603, Symbol=1UF
L1: Add into BOM=yes, Convert to PCB=yes, Device=2nH, FootprintName=L0603, Origin Footprint=L0603, Symbol=2nH
L3: Add into BOM=yes, Convert to PCB=yes, Device=24nH, FootprintName=L0603, Origin Footprint=L0603, Symbol=24nH
R6: Contributor=LCEDA_Lib, nameAlias=Value(Ω), spicePre=R, spiceSymbolName=R_0603_US
R11 R14: Add into BOM=yes, Convert to PCB=yes, Device=5.1k, FootprintName=R0603, ModelId=fc143cca1e79419f9cd78b61e9279f08, ModelName=R0603, Origin Footprint=R0603, Symbol=5.1k

## Free pads (board coordinates)
  oval 39.37x90 smd: 2(75,65.77) 2(147.59,65.77)

## Via types
v1: diameter 20, hole 12, Top Layer to Bottom Layer, tented both sides, 73 vias

## Nets (pads, with @x,y where several pads share a name; then routed paths per layer and width w, separated by ;. In a path a pad name is that pad's centre, name@x,y a point inside that pad or via, vN(x,y) a via of type N, cw(c..) or ccw(c..) an arc to the next point about the centre after c; other vN are vias at no path point)
3.3V: C4.1 C5.1 C7.2 C8.2 C9.2 C11.2 C12.2 C13.1 C21.2 C29.2 C30.2 ESP1.11 ESP1.17 ESP1.18 ESP1.31 ESP1.32 L1.1 L2.1 P1.15 R1.2 R4.1 R7.1 R15.2 R16.2 R17.2 R18.2 U2.5 | length 4080.7
  Top Layer w7: ESP1.31 ESP1.32 ; C7.2 813.46,559.21 807.12,552.87 800.29,552.87 765.5,518.08 765.5,501.92 783.65,483.78 789.57,483.78 814.06,459.29 C4.1 C5.1
  Top Layer w8: C21.2 371.54,625.79 421.77,676.02 421.77,679.11 468.86,726.2 481.6,726.2 ESP1.18 ESP1.17 ; C13.1 408.45,790 443.45,825 598.28,825 610.2,813.08 ESP1.11 ; C12.2 572.63,996.54 578.93,1002.84 578.93,1011.62 588.55,1021.25 620.17,1021.25 644.11,1045.19 651.05,1045.19 678.91,1073.05 678.91,1103.05 P1.15 ; ESP1.32 649.5,573.6 663.1,560 C7.2 819.3,565.84 819.3,567.38 832.56,580.63 865.1,580.63 887.12,558.62 919.67,558.62 945,533.28 945,516.72 932.96,504.68 R17.2 932.96,432.04 v1(955,410) ; C8.2 C9.2 819.9,714.34 819.9,729.73 833.9,743.73 833.9,744.47 847.14,757.71 L1.1 847.14,759.29 866.98,779.13 866.98,823.27 854.38,835.87 854.38,851.87 847.75,858.5 R1.2 ; R16.2 1052.04,219.96 1071.38,239.3 1071.38,286.16 1052.55,305 v1(1090,305)
  Top Layer w12: L2.1 120,855 101.57,836.57 90.8,836.57 72.37,818.15 72.37,751.85 79.4,744.83 184.51,744.83 241.52,687.82 U2.5@255,687.82 ; C29.2 C30.2 U2.5@255,687.82 ; v1(400,595) 400,595.75 371.54,624.21 C21.2 367.7,628.84 367.7,645.61 348.9,664.4 348.9,669.56 338.46,680 R7.1 ; C11.2 C12.2 ; v1(500,1025) 501.53,1023.47 C11.2@501.53,1000.01 ; v1(760,580) 793.46,580 808.83,564.63 809.62,564.63 813.46,560.79 C7.2 ; R1.2 847.13,858.5 836.69,868.94 836.69,874.1 783.8,927 477,927 v1(395,845) 395,814.25 371.54,790.79 C13.1 371.54,789.21 360.3,777.97 360.3,774.4 343.1,757.19 343.1,739.63 338.46,735 R4.1 R7.1 ; U2.5@255,687.82 U2.5 330.06,687.4 337.45,680 R7.1
  Bottom Layer w8: v1(955,410) 985,410 v1(1090,305)
  Bottom Layer w12: v1(395,845) 500,950 v1(500,1025) ; v1(400,595) 675,595 690,580 v1(760,580)
ADC_VBAT: C10.2 ESP1.4 R2.1 R3.2 | length 1223.2
  Top Layer w7: R2.1 308.46,60 315.6,67.13 v1(315.6,86.31) ; ESP1.4 678.71,669.11 704.89,669.11 v1(705.4,669.62) ; v1(785,510) C10.2
  Bottom Layer w7: v1(315.6,86.31) 315.6,89.83 318.74,92.97 318.74,292.74 425,399 425,530 469.5,574.5 631.86,574.5 641.86,564.5 730.5,564.5 v1(785,510) 785,589.67 v1@706.35,668.33 ; v1(705.4,669.62) v1@706.35,668.67
ANT: ESP1.1 R12.1 | length 134.9
  Top Layer w12: ESP1.1 700,609.6 ; R12.1@812.76,609.8 R12.1
  Top Layer w15: 700,609.6 700.2,609.8
  Top Layer w18: 700.2,609.8 R12.1@812.76,609.8
BOOT: ESP1.15 R7.2 | length 230.6
  Top Layer w7: R7.2 372.55,680 428.3,735.75 428.3,745.88 480.72,798.3 521.13,798.3 529.4,790.04 529.4,778 ESP1.15
EN: C2.2 ESP1.7 R1.1 | length 267.8
  Top Layer w7: ESP1.7 734.05,727.7 784.98,778.63 818.1,778.63 833.4,793.93 ; R1.1@814.06,858 R1.1 814.07,858.5 827.01,845.56 827.01,843.42 840.8,829.63 840.8,814.84 C2.2 847.14,807.71 833.4,793.97
EPD_BUSY: ESP1.16 P1.9 | length 394.4
  Top Layer w7: v1(485,775) 510.7,775 ESP1.16 ; v1(525,1045) 525,1046.58 542.92,1064.5 551.55,1064.5 560.45,1073.41 560.45,1102.59 P1.9
  Bottom Layer w7: v1(485,775) 485,890 525,930 v1(525,1045)
EPD_CS: ESP1.10 P1.12 | length 340.7
  Top Layer w7: P1.12 624.33,1102.59 624.33,1066.97 629.43,1061.87 v1(629.43,1060.31) ; ESP1.10 629.8,871.28 640,881.48 v1(640,885)
  Bottom Layer w7: v1(629.43,1060.31) 629.43,1056.79 640,1046.22 v1(640,885)
EPD_DC: ESP1.9 P1.11 | length 353.1
  Top Layer w7: P1.11 602.23,1052.34 609.81,1044.76 v1(609.81,1041.25) ; ESP1.9 649.5,825.98 655,831.48 v1(655,835)
  Bottom Layer w7: v1(609.81,1041.25) 609.81,880.19 v1(655,835)
EPD_DIN: ESP1.13 P1.14 | length 529.1
  Top Layer w7: v1(564.08,802.94) 564.08,799.43 568.8,794.71 568.8,778 ESP1.13 ; P1.14 661.29,1144.89 670,1153.6 v1(670,1155)
  Bottom Layer w7: v1(564.08,802.94) 564.08,927.77 570.5,934.19 570.5,1113.08 631.92,1174.5 650.5,1174.5 v1(670,1155)
EPD_RST: ESP1.8 P1.10 | length 500.8
  Top Layer w7: v1(540,905) 647.58,905 678.2,874.38 ESP1.8 ; v1(551,1045) 553.49,1047.49 562.49,1047.49 582.55,1067.55 P1.10
  Bottom Layer w7: v1(540,905) 540,1030.48 551,1041.48 v1(551,1045)
EPD_SCK: ESP1.12 P1.13 | length 450.6
  Top Layer w7: v1(590,805) 590.25,804.75 590.25,776.25 ESP1.12 ; v1(640,1155) 640.8,1154.2 640.8,1105.8 P1.13
  Bottom Layer w7: v1(590,805) 590,1105 v1(640,1155)
GDR: P1.2 Q1.1 R5.1 | length 495.9
  Top Layer w7: R5.1 116.13,802.04 125.78,811.69 125.78,813.02 149.94,837.18 171.39,837.18 223.91,889.7 Q1.1 257.6,893.65 332.71,968.76 332.71,1003.12 395.56,1065.97 415.24,1065.97 422.66,1073.4 422.66,1102.59 P1.2
GND: C1.1 C2.1 C3.1 C4.2 C5.2 C7.1 C8.1 C9.1 C10.1 C11.1 C12.1 C13.2 C14.1 C15.1 C16.1 C17.1 C18.1 C19.1 C20.1 C21.1 C22.1 C23.2 C24.1 C25.1 C26.1 C27.2 C28.1 C29.1 C30.1 C31.1 C32.1 D2.1 ESP1.33 L4.1 P1.8 P1.17 pad.2@147.59,65.77 R3.1 R5.2 R6.2 R9.1 R10.1 R11.1 R14.1 SW1.1 SW2.1 U1.2 U2.2 USB1.1 USB1.12 USB1.13 USB1.14 USB1.15 USB1.16 X1.2 X1.4 | length 457.1
  Top Layer w6: X1.4 566.07,404.13 607.32,362.88 607.32,352.68 v1(610,350) ; v1(995,440) 1026.08,440 1120.93,534.85 1142.79,534.85 SW2.1
  Top Layer w7: C26.1 501.39,441.96 507.73,435.62 507.73,434.83 536.46,406.1 X1.4 584.23,424.25 584.23,438.04 625.12,478.94 X1.2
  other v1: 195,124 940,145 965,295 95,330 365,465 990,535 990,560 540.6,648.5 990,670 990,700 955,720 990,725 990,750 990,780 990,815 955,820 730,835 990,845 990,875 390,900 990,900 960,920 990,930 990,955 990,985 990,1010 990,1040 70,1050 955,1065 990,1065 985,1100 995,1135 1020,1180 1050,1180 1090,1180 1120,1180 1155,1180 1185,1180 1215,1180 1245,1180
KEY1: C31.2 ESP1.5 R16.1 SW1.2 | length 854
  Top Layer w7: ESP1.5 679.02,689.12 717.37,689.12 726.24,680.24 v1(729.76,680.24) ; v1(895,520) 895,312.96 1010.32,197.63 1010.32,197.13 1017.45,190 R16.1 1018.47,190 1031.41,177.06 1031.41,174.92 1045.2,161.13 1045.2,146.34 C31.2 1090.45,140 1149.83,140 SW1.2 ; SW1.2@1141.63,146.8 SW1.2@1153.88,159.05
  Bottom Layer w7: v1(729.76,680.24) 732.26,680.24 892.5,520 v1(895,520)
KEY2: C19.2 ESP1.6 R15.1 SW2.2 | length 848.3
  Top Layer w7: ESP1.6 738.48,708 746.24,700.24 v1(749.76,700.24) ; v1(925,525) 925,521.48 912.33,508.81 912.33,410.63 1010.32,312.63 1010.32,312.13 1017.45,305 R15.1 R15.1@1018.47,305 ; C19.2 1045.2,261.34 1045.2,276.13 1031.41,289.92 1031.41,292.06 R15.1@1018.47,305 ; SW2.2 1153.88,395.86 1103.7,345.68 1057.52,345.68 1025.59,313.76 1025.59,312.13 R15.1@1018.47,305
  Bottom Layer w7: v1(749.76,700.24) v1(925,525)
NetAE1_1: AE1.1 R13.2 | length 271.6
  Top Layer w19.68: R13.2 1014.25,610.93 1035.65,610.85 ccw(c1025.15,726.09) 1140.3,714.65 1140.34,725 AE1.1@1140.66,803.78
NetC1_2: C1.2 P1.4 | length 132.7
  Top Layer w7: C1.2@405,998.08 405,1018.42 431.56,1044.98 433.6,1044.98 462.04,1073.42 462.04,1102.59 P1.4
NetC3_2: C3.2 P1.5 | length 119
  Top Layer w7: C3.2@455,998.08 455,1028.34 484.12,1057.46 P1.5
NetC6_1: C6.1 D1.1 D2.2 | length 272.4
  Top Layer w12: D1.1 D2.2 83.4,1216.05 161.54,1137.91 C6.1
NetC6_2: C6.2 D3.2 L2.2 Q1.3 | length 360.9
  Top Layer w12: D3.2 83.4,1136.05 128.46,1090.99 C6.2 L2.2@128.46,977.48 ; L2.2 L2.2@128.46,977.48 ; Q1.3 131.28,980.3 L2.2@128.46,977.48
NetC14_2: C14.2 P1.18 | length 151.4
  Top Layer w7: C14.2 650.79,998.08 690.7,1037.99 702.17,1037.99 737.6,1073.42 737.6,1102.59 P1.18
NetC15_2: C15.2 P1.19 | length 132.1
  Top Layer w7: C15.2 700.79,998.08 759.68,1056.97 P1.19
NetC16_2: C16.2 P1.20 | length 119
  Top Layer w7: C16.2 750,1028.11 779.45,1057.57 P1.20
NetC18_2: C18.2 P1.22 | length 120.2
  Top Layer w7: P1.22 818.82,1029.26 842.87,1005.21 842.87,1004.42 849.21,998.08 C18.2
NetC22_2: C22.2 P1.24 | length 149.9
  Top Layer w7: P1.24 858.21,1081.26 860.62,1078.85 868.44,1078.85 949.21,998.08 C22.2
NetC27_1: C27.1 L3.2 X1.1 | length 145.2
  Top Layer w7: X1.1 663.95,406.1 699.81,441.96 L3.2 704.06,438.5 C27.1
NetC32_2: C32.2 P1.16 R18.1 | length 456.1
  Top Layer w7: P1.16 698.22,1102.57 698.22,1073.27 656.65,1031.69 649.7,1031.69 620.89,1002.88 606.34,1002.88 C32.2 606.34,990.2 607.17,990.2 626.58,970.79 626.58,954.51 638.59,942.5 815.66,942.5 833.6,924.57 833.6,922.94 846.54,910 R18.1
NetESP1_2: ESP1.2 ESP1.3 L1.2 | length 213.5
  Top Layer w7: ESP1.2 ESP1.3 726.1,649 794.72,717.62 794.72,739.16 L1.2
NetESP1_14: ESP1.14 R4.2 | length 232.3
  Top Layer w7: R4.2 372.55,735 448.85,811.3 527.84,811.3 549.1,790.04 549.1,778 ESP1.14
NetESP1_27: ESP1.27 LED2.2 | length 864.6
  Top Layer w7: v1(550,555) 550.55,555.55 550.55,580.35 ESP1.27 ; v1(1199,689.14) 1202.52,689.14 1208.87,695.49 1223.81,695.49 LED2.2
  Bottom Layer w7: v1(550,555) 632.97,555 636.47,551.5 715.92,551.5 776.92,490.5 1075.5,490.5 1136.01,551.01 1136.01,556.01 1199,619 v1(1199,689.14)
NetL4_2: L4.2 R12.2 R13.1 | length 132.2
  Top Layer w18: R12.2 R12.2@847.51,610.47 ; R13.1@978.41,610.47 R13.1
  Top Layer w20: R12.2@847.51,610.47 R13.1@978.41,610.47
NetLED1_1: LED1.1 R8.1 | length 56.4
  Top Layer w7: R8.1 LED1.1
NetLED1_2: LED1.2 U1.1 | length 86.3
  Top Layer w7: LED1.2 92.07,269.47 172.51,269.47 U1.1
NetLED2_1: LED2.1 R17.1 | length 339
  Top Layer w7: R17.1 1035,485 1213.64,663.64 1225.04,663.64 LED2.1
NetR9_2: R9.2 U1.5 | length 104.7
  Top Layer w7: R9.2@229.93,357.11 230.43,357.11 244.67,342.87 244.67,342.37 265.42,321.62 U1.5
NetR11_2: R11.2 USB1.4 | length 195.8
  Top Layer w7: R11.2 458.63,330 469.14,319.49 531.77,319.49 548.21,303.06 574.49,303.06 579.73,297.81 579.73,264.38 USB1.4@580.71,263.4
NetR14_2: R14.2 USB1.10 | length 155.4
  Top Layer w7: USB1.10 701.31,262.73 701.31,284.04 747.27,330 R14.2
PREVGH: C17.2 D3.1 P1.21 | length 853.5
  Top Layer w12: D3.1 216.6,1143.95 262.58,1189.93 262.58,1231.52 295.87,1264.8 671.93,1264.8 799.06,1137.68 799.06,1081.54 800,1080.6 C17.2
PREVGL: C20.2 D1.2 P1.23 | length 849.6
  Top Layer w12: D1.2@221.6,1300 676.1,1300 838.42,1137.68 838.42,1104.97 P1.23 838.62,1104.78 838.62,1058.68 899.21,998.08 C20.2
RESE: P1.3 Q1.2 R6.1 | length 493
  Top Layer w7: R6.1 171.59,802.04 190.43,820.88 237.67,820.88 291.72,874.93 291.72,875.27 306.15,889.7 Q1.2 332.4,950.07 366.67,984.34 366.67,1018.7 400.94,1052.97 421.17,1052.97 426.17,1057.98 426.92,1057.98 442.35,1073.41 442.35,1102.59 P1.3
UD_N: ESP1.25 USB1.5 USB1.7 | length 486.8
  Top Layer w7: ESP1.25 513.05,579.55 513.05,558.6 498.73,544.28 474.34,544.28 448,517.94 448,404.96 511.48,341.47 558.75,341.47 v1@601.73,298.49 ; v1(639.66,290.41) 639.75,290.32 639.75,260.41 USB1.7
  Bottom Layer w7: v1(599.23,291.91) 599.99,291.16 638.91,291.16 v1(639.66,290.41)
UD_P: ESP1.26 USB1.6 USB1.8 | length 534.9
  Top Layer w7: ESP1.26 530.05,579.55 530.05,551.56 505.77,527.28 481.38,527.28 465,510.9 465,412 518.53,358.47 565.79,358.47 618.73,305.53 618.73,302.01 ; USB1.6@620.08,263.4 618.73,264.75 618.73,302.01 ; USB1.8@659.45,263.4 659.53,263.48 659.53,298.12 647.74,309.91 626.64,309.91 618.73,302.01
VBAT: C25.2 pad.2@75,65.77 Q2.3 R2.2 U1.3 | length 914.9
  Top Layer w7: pad.2@75,92.49 76.4,92.49 104.19,120.27 162.18,120.27 222.45,60 R2.2
  Top Layer w15: C25.2@70.39,401.15 72.34,399.2 94.3,399.2 210.86,282.64 210.86,214.76 202.95,206.85 201.96,206.85 187.71,192.6 U1.3 ; pad.2@75,92.49 45.87,121.62 45.87,383.89 61.17,399.2 68.44,399.2 73.13,403.88 73.13,421.01 117.12,465 Q2.3
VBUS: C24.2 D5.1 Q2.1 R8.2 R10.2 U1.4 USB1.2 USB1.11 | length 1379.2
  Top Layer w7: R8.2 224.41,147.96 242.8,129.57 ; 242.8,129.53 C24.2@256.54,115.79 ; C24.2 C24.2@256.54,115.79 ; U1.4 265.42,124.67 C24.2@256.54,115.79
  Top Layer w12: v1(461,280) 462,281 462,299.95 ; USB1.11 730.3,266.13 730.3,285.07 744.7,299.47 759.47,299.47 v1(761,301)
  Top Layer w15: Q2.1 232.88,427.6 239.34,434.06 D5.1 315,387.96 319.33,383.63 319.33,383.13 322.45,380 R10.2 324.13,378.83 324.13,237.83 U1.4@278.9,192.6 ; U1.4 U1.4@278.9,192.6 ; USB1.2@539.82,256.01 USB1.2 531.2,264.63 531.2,285.7 516.95,299.95 462,299.95 428.14,299.95 320.79,192.6 U1.4@278.9,192.6 ; USB1.11@720.18,256.01 USB1.11
  Bottom Layer w12: v1(461,280) 494.91,313.91 629.05,313.91 630.55,312.41 749.59,312.41 v1(761,301)
VSYS: C23.1 C28.2 D5.2 Q2.2 U2.1 U2.3 | length 540.5
  Top Layer w15: C23.1 110.22,567.44 128.09,585.31 128.09,589.24 151.45,612.6 U2.3 U2.3@177.71,612.6 ; C28.2 91.54,685.06 93.88,687.4 U2.1 177.71,687.4 190.46,674.65 191.44,674.65 200.86,665.24 200.86,634.76 192.95,626.85 191.96,626.85 U2.3@177.71,612.6 ; D5.2 315,510.43 306.97,502.4 Q2.2 223.62,566.68 U2.3@177.71,612.6
XTAL_N: C26.2 ESP1.29 X1.3 | length 178
  Top Layer w7: C26.2 560.21,475.04 X1.3 566.07,525.1 590.5,549.53 ESP1.29
XTAL_P: ESP1.30 L3.1 | length 143.8
  Top Layer w7: ESP1.30 612.2,578.9 612.2,562.65 699.81,475.04 L3.1
pads on no net: AE1.2 ESP1.19 ESP1.20 ESP1.21 ESP1.22 ESP1.23 ESP1.24 ESP1.28 FD1.1 FD2.1 FD3.1 FD4.1 P1.1 P1.6 P1.7 P1.25 P1.26 SW1.3 SW1.4 SW2.3 SW2.4 U2.4 USB1.3 USB1.9

## Polygon pours and split planes (outlines as drawn)
GND on Bottom Layer "GND_L02_P001" (solid, remove dead copper, pour order 1): -50,1495 -40,1485 1365,1485 1365,-115 1330,-150 1305,-125 -85,-125 -85,1475
GND on Top Layer "GND_L01_P000" (solid, remove dead copper, pour order 0): -40,1490 -35,1485 1335,1485 1335,-135 1295,-95 -55,-95 -55,1475

## Other copper
Multi-Layer:
  pour cut-out: 1475,1165 1405,1095 1405,385 1040,385 1005,420 1005,1165
  pour cut-out: 575.6,568.5 510.6,503.5 510.6,498.5 480.6,498.5 470.6,488.5 470.6,433.5 531.63,372.47 656.63,372.47 665.6,363.5 669.97,367.87 725.6,367.87 725.6,448.5 715.6,458.5 715.6,493.5 710.6,493.5 635.6,568.5 620.6,568.5

## Silkscreen, mask and mechanical layers (free items; w line width, h text height)
Top Overlay:
  text "+" at 8,35 h60
Mechanical 1:
  the board outline again, w5